# EAGLE board driver_fet (EAGLE 6.5.0)
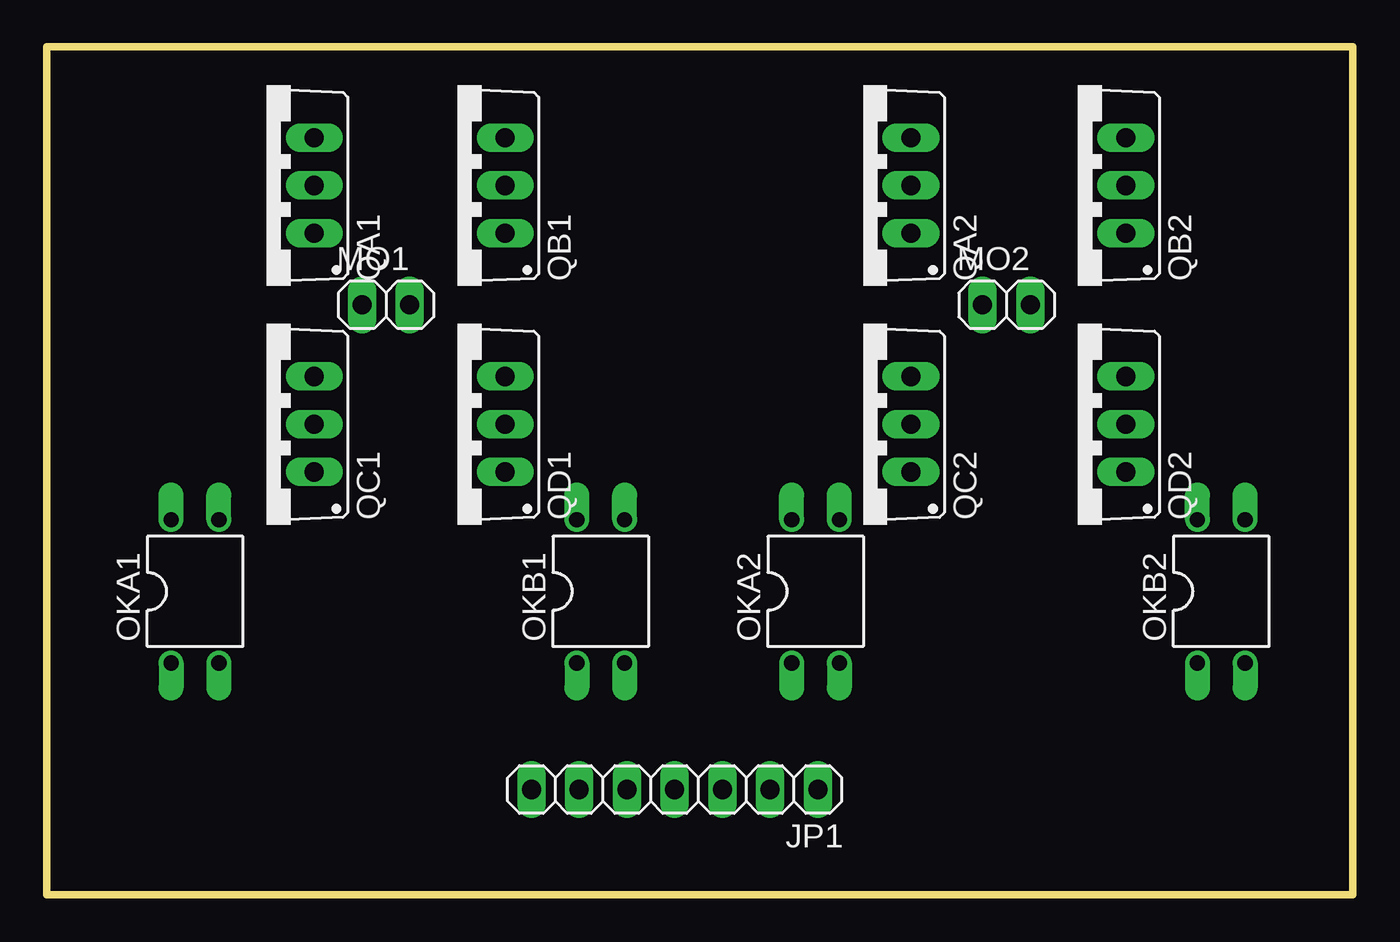
[diagram p0: board, top side]
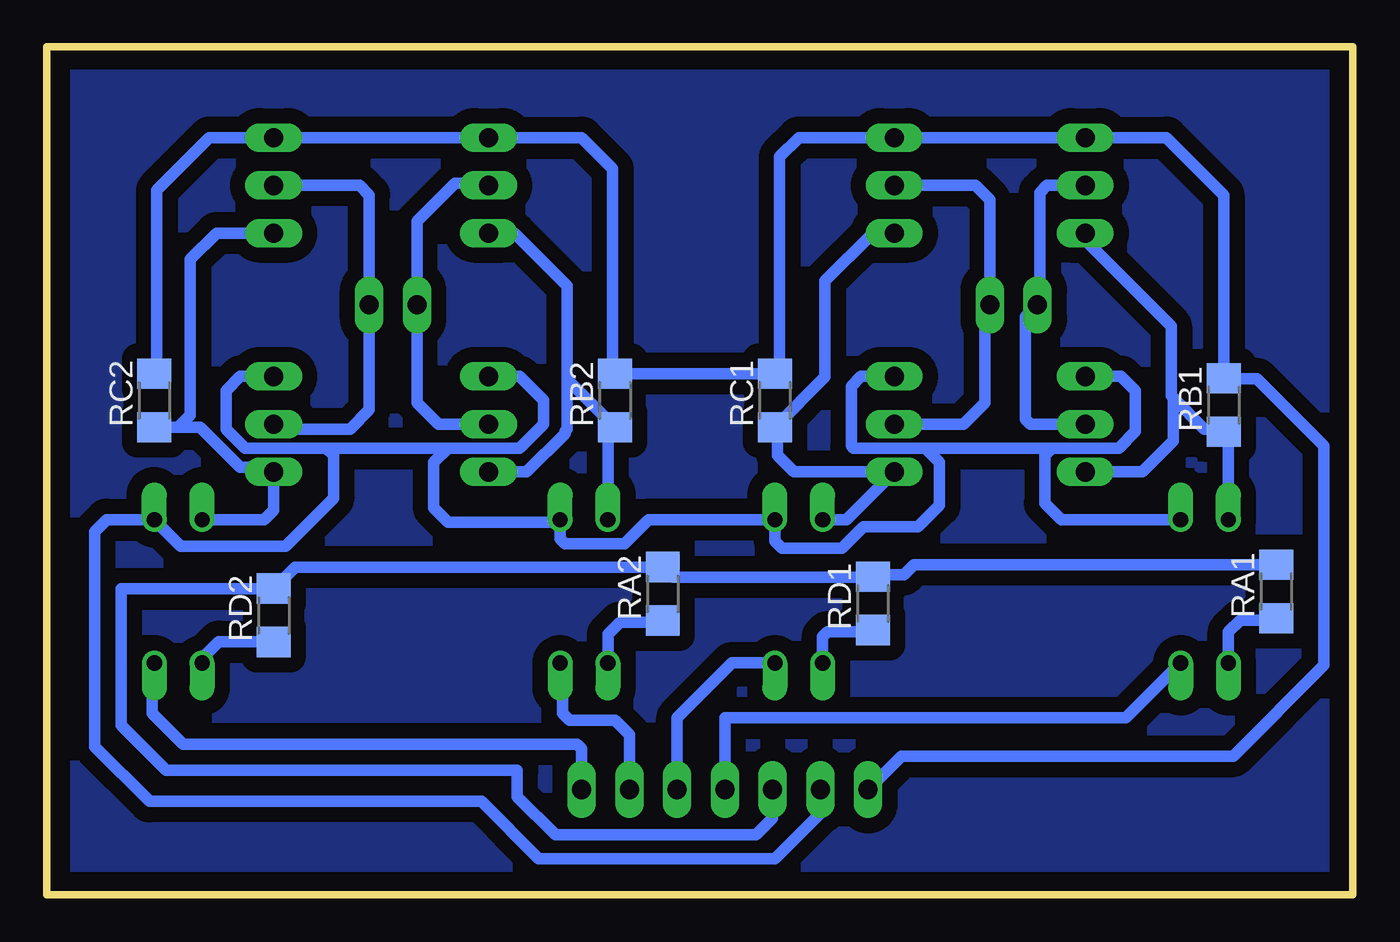
[diagram p1: board, bottom side, seen from below]

Size 69.47 x 45.08 mm. Coordinates in mm from the lower left corner, seen from the top.
Outline: 0,45.08 69.47,45.08 69.47,0 0,0 0,45.08
Copper layers (1*16): Top 0.035mm / dielectric 1.5mm / Bottom 0.035mm
Design rules "default": minimum track width 10mil, minimum drill 24mil, track to track 8mil, track to pad 8mil, pad to pad 8mil, via to via 8mil, smd to smd 8mil, copper to edge 40mil, drill to drill 8mil, minimum pad ring 10mil, minimum via ring 8mil, stop-mask expansion 4mil, vias tented up to drill 0mil, thermal gap 10mil

## Footprints (pad centres in the part's own frame; a part is rotated, then mirrored left to right if it is on the bottom)
1X07 = drill 1.016 long: 1 -7.62,0; 2 -5.08,0; 3 -2.54,0; 4 0,0; 5 2.54,0; 6 5.08,0; 7 7.62,0
1X02 = drill 1.016 long: 1 -1.27,0; 2 1.27,0
DIL04 = drill 0.813 offset: 1 -1.27,-3.81; 2 1.27,-3.81; 3 1.27,3.81; 4 -1.27,3.81
TO220BV = drill 1.016 long: D 0,-2.54; G -2.54,-2.54; S 2.54,-2.54
R1206 = smd 1.6 x 1.803: 1 -1.422,0; 2 1.422,0

## Placement (x,y rotation side)
JP1  [1X07]  33.4,5.59 180 top
MO1  [1X02]  18.03,31.37 0 top
MO2  [1X02]  51.05,31.37 0 top
OKA1  PC817  [DIL04]  7.87,16.13 0 top
OKA2  PC817  [DIL04]  40.89,16.13 0 top
OKB1  PC817  [DIL04]  29.46,16.13 0 top
OKB2  PC817  [DIL04]  62.48,16.13 0 top
QA1  IRF9530  [TO220BV]  11.68,37.72 90 top
QA2  IRF9530  [TO220BV]  43.43,37.72 90 top
QB1  IRF9530  [TO220BV]  21.84,37.72 90 top
QB2  IRF9530  [TO220BV]  54.86,37.72 90 top
QC1  IRF530  [TO220BV]  11.68,25.02 90 top
QC2  IRF530  [TO220BV]  43.43,25.02 90 top
QD1  IRF530  [TO220BV]  21.84,25.02 90 top
QD2  IRF530  [TO220BV]  54.86,25.02 90 top
RA1  330  [R1206]  4.06,16.13 90 bottom
RA2  330  [R1206]  36.7,16 90 bottom
RB1  4k7  [R1206]  6.86,26.04 90 bottom
RB2  4k7  [R1206]  39.24,26.29 90 bottom
RC1  4k7  [R1206]  30.73,26.29 90 bottom
RC2  4k7  [R1206]  63.75,26.29 90 bottom
RD1  330  [R1206]  25.53,15.49 90 bottom
RD2  330  [R1206]  57.4,14.86 90 bottom

## Library data of the parts
JP1 MO1 MO2 = pinhead
OKA1 OKA2 OKB1 OKB2 = optocoupler; MPN: PC817X4J000F; OC_FARNELL: 9707727; OC_NEWARK: 97K7059
QA1 QA2 QB1 QB2 QC1 QC2 QD1 QD2 = transistor-power
RA1 RA2 RB1 RB2 RC1 RC2 RD1 RD2 = resistor

## Nets
GND: JP1.6 OKA1.3 OKA2.3 OKB1.3 OKB2.3 QC1.S QC2.S QD1.S QD2.S
N$1: MO1.1 QA1.D QC1.D
N$2: MO1.2 QB1.D QD1.D
N$3: MO2.1 QA2.D QC2.D
N$4: MO2.2 QB2.D QD2.D
N$5: OKA1.4 QA1.G QC1.G RB1.1
N$6: OKB1.4 QB1.G QD1.G RC1.1
N$7: OKA2.4 QA2.G QC2.G RB2.1
N$8: OKA1.1 RA1.1
N$9: OKB1.1 RD1.1
N$10: OKB2.4 QB2.G QD2.G RC2.1
N$13: OKA2.1 RA2.1
N$14: OKB2.1 RD2.1
PA1: JP1.4 OKA1.2
PA2: JP1.2 OKA2.2
PB1: JP1.3 OKB1.2
PB2: JP1.1 OKB2.2
V9: JP1.7 QA1.S QA2.S QB1.S QB2.S RB1.2 RB2.2 RC1.2 RC2.2
VDD: JP1.5 RA1.2 RA2.2 RD1.2 RD2.2

## Tracks (layer width: path | path; a pad name or v marks a point on that pad's centre or on a via)
GND
  Bottom 0.61: QC1.S 12.32,27.56 11.56,26.8 11.56,24.64 12.45,23.75 16,23.75 | 16,23.75 16.38,23.37 16.38,20.83 15.49,19.94 OKA1.3 | 22.73,23.75 26.54,23.75 26.67,23.88 26.67,27.05 26.16,27.56 QD1.S | 22.73,23.75 21.97,22.99 21.97,20.7 23.11,19.56 26.03,19.56 27.18,18.41 30.35,18.41 30.73,18.8 OKB1.3 37.46,19.94 38.73,18.67 41.91,18.67 42.16,18.92 OKA2.3 42.29,19.81 48.13,19.81 48.89,20.57 48.89,22.99 48.13,23.75 | 22.73,23.75 16,23.75 | QC2.S 44.32,27.56 43.05,26.29 43.05,25.02 44.32,23.75 48.13,23.75 | QD2.S 59.18,27.56 59.94,26.8 59.94,24.77 58.93,23.75 54.61,23.75 | 54.61,23.75 48.13,23.75 | 54.61,23.75 54.23,23.37 54.23,21.08 56.77,18.54 62.36,18.54 OKB2.3 66.29,19.94 66.93,19.3 66.93,7.87 64.01,4.95 46.35,4.95 43.31,1.91 30.73,1.91 28.32,4.32 JP1.6
N$1
  Bottom 0.61: QC1.D 17.15,25.02 17.4,25.27 17.4,30.73 MO1.1 16.64,31.5 16.64,37.34 16.26,37.72 QA1.D
N$2
  Bottom 0.61: QB1.D 20.07,37.72 19.3,36.96 MO1.2 19.56,31.12 19.56,26.16 20.7,25.02 QD1.D
N$3
  Bottom 0.61: QC2.D 48.64,25.02 49.78,26.16 MO2.1 49.78,35.81 47.75,37.85 46.1,37.85 QA2.D
N$4
  Bottom 0.61: QB2.D 52.83,37.72 52.32,37.21 MO2.2 52.32,25.78 53.34,24.77 57.15,24.77 QD2.D
N$5
  Bottom 0.61: QA1.G 14.22,34.8 9.65,30.23 9.65,26.54 9.59,26.48 9.53,26.42 | 9.53,26.42 7.87,24.77 7.01,24.77 RB1.1 6.6,24.36 OKA1.4 | QC1.G 11.18,22.48 9.53,24.13 9.53,26.42
N$6
  Bottom 0.61: OKB1.4 26.92,19.94 QD1.G 29.72,22.48 30.61,23.37 30.61,24.74 RC1.1 28.07,27.53 28.07,32.64 25.53,35.18 QB1.G
N$7
  Bottom 0.61: OKA2.4 39.62,24.49 RB2.1 41.78,27.41 | QA2.G 44.58,35.18 41.78,32.38 41.78,28.45 41.78,27.41 | QC2.G 43.94,22.48 41.91,24.51 41.91,24.64 41.78,24.77 41.78,27.41
N$8
  Bottom 0.61: OKA1.1 6.6,13.97 5.97,14.6 4.17,14.6 RA1.1
N$9
  Bottom 0.61: OKB1.1 28.19,13.72 27.94,13.97 25.63,13.97 RD1.1
N$10
  Bottom 0.61: OKB2.4 57.91,19.94 57.4,20.45 QD2.G 57.66,22.73 59.18,22.73 61.32,24.87 62.48,24.87 | RC2.1 62.48,24.87 | QB2.G 60.45,35.18 61.85,33.78 61.85,25.5 62.48,24.87
N$11
  pour Bottom (isolate 0.813): 0.13,45.08 69.09,44.83 69.09,0.25 -0.13,0.25
N$13
  Bottom 0.61: OKA2.1 39.62,13.84 38.99,14.48 36.8,14.48 RA2.1
N$14
  Bottom 0.61: OKB2.1 61.21,12.57 60.32,13.46 57.43,13.46 RD2.1
PA1
  Bottom 0.61: JP1.4 33.4,9.4 12.06,9.4 OKA1.2
PA2
  Bottom 0.61: JP1.2 38.48,8.51 39.24,9.27 41.66,9.27 42.04,9.65 42.04,12.19 OKA2.2
PB1
  Bottom 0.61: JP1.3 35.94,9.4 33.02,12.32 OKB1.2
PB2
  Bottom 0.61: JP1.1 41.02,7.75 41.27,8 62.23,8 63.88,9.65 63.88,12.19 OKB2.2
V9
  Bottom 0.61: RC2.2 63.63,27.84 63.63,37.47 60.83,40.26 QB2.S QA2.S 41.02,40.26 39.37,38.61 39.37,27.84 RB2.2 RC1.2 30.48,27.97 30.48,39.24 29.46,40.26 QB1.S QA1.S 9.91,40.26 6.86,37.21 RB1.2 6.83,27.43 5.08,27.43 1.52,23.88 1.52,12.19 6.35,7.37 24,7.37 JP1.7
VDD
  Bottom 0.61: 36.58,17.55 RA2.2 | RA2.2 56.26,17.42 RD2.2 57.43,16.26 65.53,16.26 65.53,9.02 63.12,6.6 44.45,6.6 44.45,5.21 42.42,3.18 31.75,3.18 30.86,4.06 JP1.5 | RA1.2 23.34,17.55 23.88,17.02 25.78,17.02 26.03,16.76 25.68,16.76 RD1.2 25.63,16.92 25.65,16.89 36.17,16.89 RA2.2